# Altium PCB PCBJpepz.PcbDoc (part 2 of 2)
Units mm, origin at the board's own origin, x right, y up, seen from the top; angles counter-clockwise.
Board outline 100 x 110 mm, 2 copper layers (Top Layer, Bottom Layer); 249 components, 163 nets, 729 pads, 129 vias.
Unrouted connection lines stored in the file: 167.
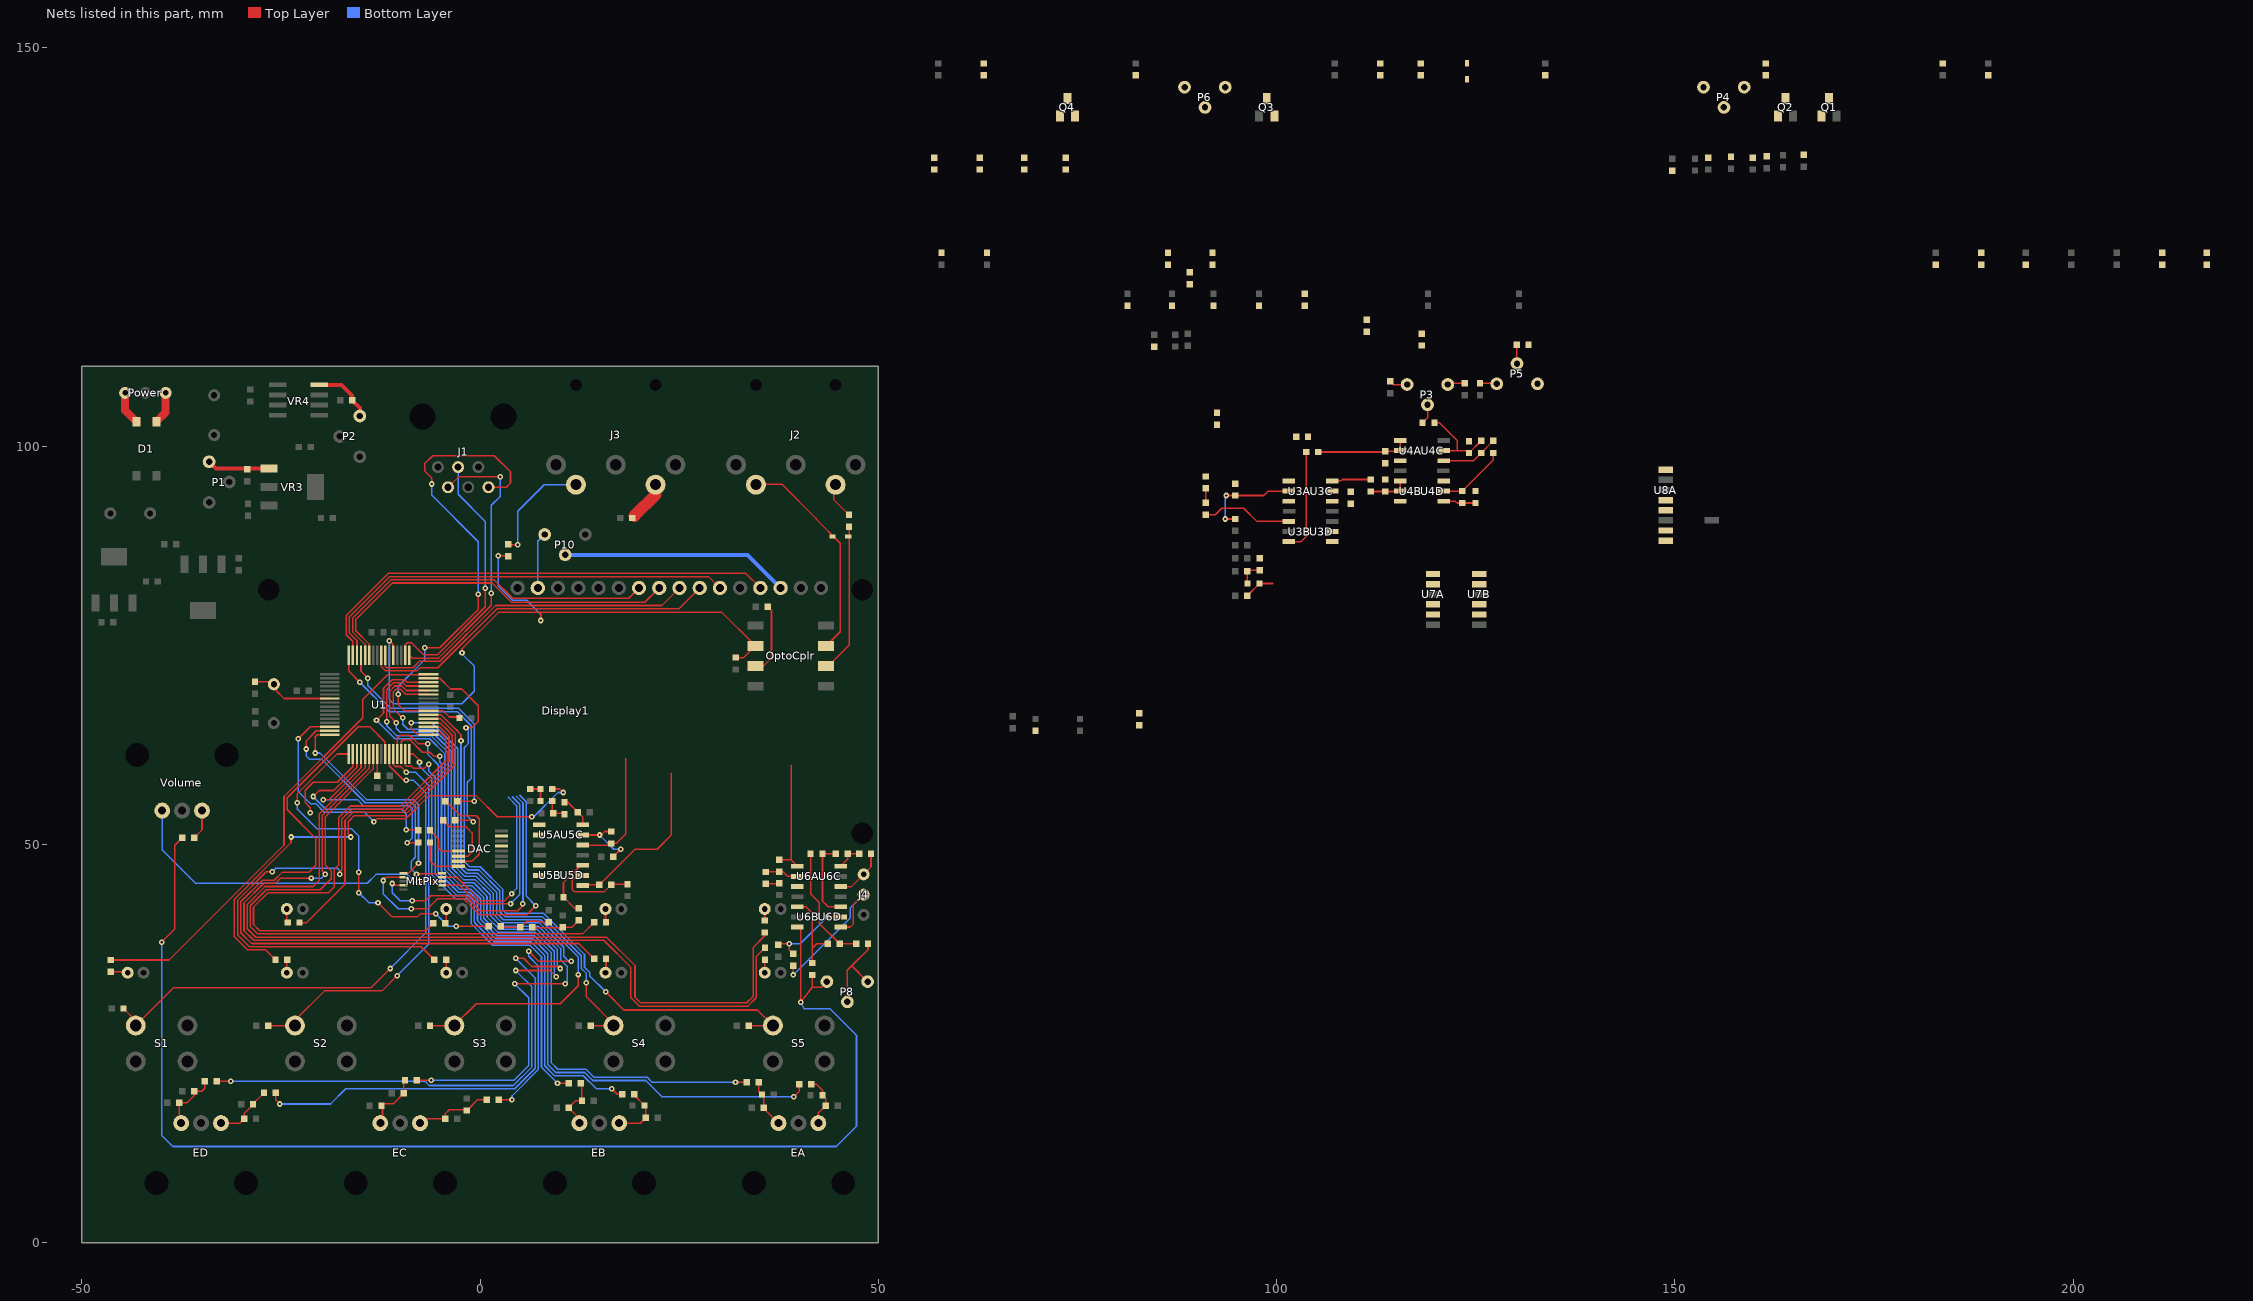
[diagram p2: the nets of this part, all layers, seen from the top]

## Via types
v1: diameter 0.7, hole 0.3, Top Layer to Bottom Layer, 119 vias
v2: diameter 1, hole 0.5, Top Layer to Bottom Layer, 10 vias

## Nets (pads, with @x,y where several pads share a name; then routed paths per layer and width w, separated by ;. In a path a pad name is that pad's centre, name@x,y a point inside that pad or via, vN(x,y) a via of type N, cw(c..) or ccw(c..) an arc to the next point about the centre after c; other vN are vias at no path point) (continued)
NetC12_2: C12.2 U1.39 Y1.1 | length 10.7
  Top Layer w0.2: C12.2@-28.194,70.409 -25.832,70.409 -25.527,70.104 -25.527,69.215 -24.622,68.31 U1.39@-18.885,68.31
NetC13_2: C13.2 U1.56 | length 2.9
  Top Layer w0.2: U1.56@-12.946,61.349 -12.946,59.317 -12.946,58.555 C13.2@-12.903,58.598
NetC19_1: C19.1 DAC.15
NetC19_2: C19.2 MltPlx.2 R17.1 | length 40.8
  Top Layer w0.2: v1(-12.192,45.466) -11.803,45.855 MltPlx.2@-9.652,45.855 ; v1(-8.636,41.91) -6.604,41.91 -5.353,43.161 -2.057,43.161 -1.22,42.324 -1.22,42.31 -0.058,41.148 5.842,41.148 v1(6.985,42.291)
  Bottom Layer w0.2: v1(-12.192,45.466) -12.192,43.815 -10.287,41.91 v1(-8.636,41.91) ; 4.976,56.157 5.772,55.361 5.772,43.504 v1(6.985,42.291)
NetC20_1: C20.1 DAC.13
NetC23_1: C23.1 R19.2 R36.2 U4B.1 U4B.2 | length 5
  Top Layer w0.2: C23.1@111.811,94.31 R36.2@113.614,94.31 115.486,94.31 115.537,94.361 U4B.1@115.537,95.631
NetC23_2: C23.2 R22.1 U3C.3 | length 4.9
  Top Layer w0.2: U3C.3@106.967,95.631 108.077,95.631 108.255,95.809 C23.2@111.811,95.809
NetC25_1: C25.1 R20.2 R37.1 U4A.1 U4A.2 | length 11.7
  Top Layer w0.2: R20.2@105.207,99.263 113.513,99.263 R37.1@113.614,99.365 115.461,99.365 115.537,99.441 U4A.1@115.537,100.711
NetC25_2: C25.2 R25.1 U3A.3
NetC28_1: C28.1 R21.1 R24.1 U3C.2
NetC28_2: C28.2 R16.1 R21.2 R29.2 U3C.1
NetC33_2: C33.2 U4A.3 U7A.5
NetC34_2: C34.2 U4B.3 U7B.5
NetC36_1: C36.1 Q4.3 R57.2 U5B.2
NetC36_2: C36.2 P6.2 P6.3 R64.1 U5B.1
NetC39_2: C39.2 R66.2 R67.1 | length 2.8
  Top Layer w0.2: C39.2@6.274,56.947 R66.2@7.569,56.947 R67.1@7.569,55.448
NetC40_2: C40.2 R67.2 R68.1 | length 3.1
  Top Layer w0.2: R67.2@9.068,55.448 9.068,53.924 10.465,53.924 R68.1@10.592,53.797
NetC41_2: C41.2 R72.2 R73.1 | length 6.4
  Top Layer w0.2: R72.2@2.591,39.7 2.718,39.573 R73.1@5.029,39.573 5.804,40.348 7.404,40.348 7.544,40.208 C41.2@8.585,40.208
NetC42_2: C42.2 R73.2 R74.1 | length 6.3
  Top Layer w0.2: R73.2@6.528,39.573 6.528,39.508 10.298,39.508 C42.2@10.363,39.573 11.481,39.573 R74.1@12.37,40.462
NetC43_2: C43.2 R77.2 R78.1 | length 3.1
  Top Layer w0.2: R78.1@96.342,82.753 96.317,82.779 C43.2@96.317,84.277 96.444,84.404 R77.2@97.866,84.404
NetC44_2: C44.2 R78.2 U6A.3 | length 3.8
  Top Layer w0.2: C44.2@96.317,81.229 R78.2@97.841,82.753 99.492,82.753
NetC47_1: C47.1 C48.2 P8.1 U6B.3 | length 163.1
  Top Layer w0.2: v1(-40.005,37.719) -38.354,39.37 -38.354,49.886 C48.2@-37.389,50.851 ; U6B.3@40.226,39.624 v1(40.226,30.193) 41.707,32.055 ; C47.1@41.707,33.604 41.707,32.055 ; P8.1@43.531,32.766 42.82,32.055 41.707,32.055
  Bottom Layer w0.2: v1(-40.005,37.719) -40.005,13.462 -38.608,12.065 44.704,12.065 47.244,14.605 47.244,26.035 43.942,29.337 40.701,29.337 v1(40.226,30.193)
NetC47_2: C47.2 R83.2 U6B.1 | length 10.6
  Top Layer w0.2: U6B.1@39.845,42.164 40.894,42.164 41.707,41.351 41.707,36.957 ; C47.2@41.707,35.103 41.707,36.957 ; R83.2@43.637,37.516 42.266,37.516 41.707,36.957
NetC48_1: C48.1 Volume.1 | length 3.8
  Top Layer w0.2: C48.1@-35.89,50.851 -34.925,51.816 Volume.1@-34.925,54.237
NetC49_1: C49.1 R81.1 R83.1 | length 14.9
  Top Layer w0.2: C49.1@41.478,48.844 41.478,43.808 42.545,42.741 42.545,40.107 R83.1@45.136,37.516 ; R83.1@45.161,37.541 R81.1@47.193,37.541
NetC49_2: C49.2 R84.1 U6D.3 | length 10.2
  Top Layer w0.2: R84.1@44.653,48.844 C49.2@42.977,48.844 42.977,42.875 43.688,42.164 U6D.3@45.245,42.164
NetC50_2: C50.2 EA.2 R101.2 R109.2 | length 6.4
  Top Layer w0.2: R109.2@41.58,19.888 42.215,19.888 42.977,19.126 C50.2@42.977,18.491 43.383,18.085 R101.2@43.383,17.196 42.456,16.269 EA.2@42.456,15
NetC51_2: C51.2 EA.1 R102.1 R110.2 | length 6.2
  Top Layer w0.2: R110.2@34.976,20.142 34.976,18.999 C51.2@35.382,18.593 35.611,18.364 R102.1@35.611,16.942 35.611,16.845 EA.1@37.456,15
NetC52_2: C52.2 EB.2 R103.2 R111.2 | length 7.1
  Top Layer w0.2: EB.2@17.456,15 20.105,15 R103.2@20.777,15.672 20.777,17.069 C52.2@20.625,17.221 19.355,18.491 R111.2@19.355,18.618
NetC53_2: C53.2 EB.1 R104.1 R112.2 | length 6.8
  Top Layer w0.2: EB.1@12.456,15 12.456,15.586 R104.1@11.1,16.942 11.989,17.831 C53.2@12.776,17.831 12.776,19.863 R112.2@12.624,20.015
NetC54_2: C54.2 EC.2 R105.2 R113.2 | length 10
  Top Layer w0.2: EC.2@-7.544,15 -6.999,15.545 R105.2@-4.369,15.545 -4.369,16.205 -3.886,16.688 -1.575,16.688 -0.305,17.958 R113.2@0.838,17.958
NetC55_2: C55.2 EC.1 R106.1 R114.2 | length 7.5
  Top Layer w0.2: EC.1@-12.544,15 -12.268,15.276 -12.268,17.45 -10.897,17.45 C55.2@-9.601,18.745 -9.601,20.218 R114.2@-9.449,20.371
NetC56_2: C56.2 ED.2 R107.2 R115.2 | length 7.4
  Top Layer w0.2: ED.2@-32.544,15 -30.187,15 R107.2@-29.642,15.545 -29.642,16.18 -28.677,17.145 -28.677,17.272 R115.2@-27.153,18.796
NetC57_2: C57.2 ED.1 R108.1 R116.2 | length 7.8
  Top Layer w0.2: ED.1@-37.544,15 -37.795,15.251 R108.1@-37.795,17.577 -36.779,17.577 -35.89,18.466 C57.2@-35.89,18.999 -34.976,18.999 -34.595,19.38 R116.2@-34.595,20.244
NetD1_1: D1.1 Power.1 | length 4.2
  Top Layer w1: Power.1@-44.577,106.68 -44.577,104.483 D1.1@-43.16,103.066
NetD1_2: D1.2 Power.3 | length 4.1
  Top Layer w1: D1.2@-40.66,103.066 -39.497,104.229 Power.3@-39.497,106.68
NetD2_1: D2.1 J2.5 OptoCplr.3 | length 26.7
  Top Layer w0.2: J2.5@34.491,95.201 37.895,95.201 42.175,90.921 42.175,90.84 45.212,87.803 45.212,76.708 OptoCplr.3@43.942,75.438
NetD2_2: D2.2 OptoCplr.2 R6.2 | length 18
  Top Layer w0.2: OptoCplr.2@44.069,72.771 46.355,75.057 46.355,81.312 46.35,81.317 46.35,82.683 46.355,82.688 R6.2@46.355,89.865
NetD3_1: D3.1 P4.3 Q4.2
NetD3_2: D3.2 R61.2
NetD4_1: D4.1 R87.2 | length 1.5
  Top Layer w0.2: R87.2@35.73,40.437 D4.1@35.73,41.889
NetD5_1: D5.1 R88.2 | length 1.5
  Top Layer w0.2: D5.1@35.73,33.889 R88.2@35.73,35.341
NetD6_1: D6.1 R89.2 | length 1.6
  Top Layer w0.2: R89.2@15.73,40.277 D6.1@15.73,41.889
NetD7_1: D7.1 R95.2 | length 1.7
  Top Layer w0.2: D7.1@15.799,33.958 R95.2@15.799,35.636
NetD8_1: D8.1 R96.2 | length 1.7
  Top Layer w0.2: R96.2@-4.27,40.205 D8.1@-4.27,41.889
NetD9_1: D9.1 R97.2 | length 1.6
  Top Layer w0.2: D9.1@-4.27,33.889 R97.2@-4.27,35.506
NetD10_1: D10.1 R98.2 | length 1.5
  Top Layer w0.2: R98.2@-24.27,40.398 D10.1@-24.27,41.889
NetD11_1: D11.1 R99.2 | length 1.6
  Top Layer w0.2: D11.1@-24.27,33.889 R99.2@-24.27,35.445
NetD12_1: D12.1 R100.2 | length 2
  Top Layer w0.2: R100.2@-46.406,33.985 D12.1@-44.366,33.985
NetDisplay1_3: Display1.3 P10.3 | length 28.8
  Bottom Layer w0.5: P10.3@10.668,86.36 33.553,86.36 Display1.3@37.72,82.193
NetDisplay1_4: Display1.4 U1.30 | length 54.4
  Top Layer w0.2: U1.30@-15.47,73.749 -15.47,75.549 -16.421,76.5 -16.421,78.563 -11.365,83.619 28.674,83.619 30.1,82.193
NetDisplay1_6: Display1.6 U1.31 | length 60.3
  Top Layer w0.2: U1.31@-15.986,73.749 -15.986,75.5 -16.821,76.335 -16.821,78.729 -11.531,84.019 33.354,84.019 35.18,82.193
NetDisplay1_7: Display1.7 U1.23 | length 42.5
  Top Layer w0.2: U1.23@-11.93,73.749 -11.93,72.399 -11.722,72.191 -8.416,72.191 -7.62,72.987 -5.072,72.987 1.932,79.991 22.818,79.991 25.02,82.193
NetDisplay1_8: Display1.8 U1.24 | length 45.9
  Top Layer w0.2: U1.24@-12.43,73.749 -12.43,72.333 -11.888,71.791 -7.933,71.791 -7.561,72.163 -5.33,72.163 2.098,79.591 24.958,79.591 27.56,82.193
NetDisplay1_9: Display1.9 U1.27 | length 46.9
  Top Layer w0.2: U1.27@-13.954,73.749 -13.954,75.165 -15.621,76.832 -15.621,78.232 -11.034,82.819 1.509,82.819 3.937,80.391 20.678,80.391 Display1.9@22.48,82.193
NetDisplay1_10: Display1.10 U1.28 | length 44.8
  Top Layer w0.2: U1.28@-14.454,73.749 -14.454,75.099 -16.021,76.666 -16.021,78.398 -11.2,83.219 1.744,83.219 4.072,80.891 18.638,80.891 Display1.10@19.94,82.193
NetDisplay1_15: Display1.15 P10.1 | length 7.1
  Bottom Layer w0.2: Display1.15@7.24,82.193 7.24,88.042 P10.1@8.098,88.9
NetJ1_1: J1.1 R3.1 U1.7 | length 63
  Top Layer w0.2: v1(-10.287,68.834) -10.287,67.564 -9.517,66.794 U1.7@-6.485,66.794 -4.666,66.794 -3.861,65.989 R3.1@-2.718,65.989 ; v1(-6.985,74.676) -5.08,74.676 -0.254,79.502 v1(-0.254,81.407) ; v1(-6.096,95.25) -6.096,96.012 -6.985,96.901 -6.985,97.79 -5.969,98.806 1.778,98.806 3.81,96.774 3.81,95.377 3.269,94.836 J1.1@1.04,94.836
  Bottom Layer w0.2: v1(-10.287,68.834) -10.287,69.85 -6.985,73.152 v1(-6.985,74.676) ; v1(-6.096,95.25) -6.096,93.853 -0.254,88.011 v1(-0.254,81.407)
NetJ1_4: J1.4 U1.18 | length 33.6
  Top Layer w0.2: U1.18@-9.39,73.749 -9.39,75.099 -9.34,75.049 -9.34,75.123 -9.164,75.299 -8.616,75.299 -7.104,73.787 -5.403,73.787 0.635,79.825 v1(0.635,82.169)
  Bottom Layer w0.2: J1.4@-2.77,97.376 -2.77,93.956 0.635,90.551 v1(0.635,82.169)
NetJ1_5: J1.5 U1.17 | length 36.9
  Top Layer w0.2: U1.17@-8.89,73.749 -8.528,73.387 -5.238,73.387 1.397,80.022 v1(1.397,81.534) ; J1.5@-4.04,94.836 -2.737,96.139 v1(2.54,96.139)
  Bottom Layer w0.2: v1(1.397,81.534) 1.397,92.583 2.54,93.726 v1(2.54,96.139)
NetJ2_4: J2.4 R6.1 | length 4.7
  Top Layer w0.2: J2.4@44.491,95.201 44.374,95.084 44.374,93.294 R6.1@46.304,91.364
NetJ3_4: J3.4 R5.1 | length 5
  Top Layer w1.5: R5.1@19.368,91.249 22.018,93.9 J3.4@22.018,95.163
NetJ3_5: J3.5 R8.1 | length 13.9
  Top Layer w0.2: R8.1@3.683,87.63 v1(4.699,87.63)
  Bottom Layer w0.2: v1(4.699,87.63) 4.699,91.821 8.041,95.163 J3.5@12.018,95.163
NetJ4_1: J4.1 R82.2 U6C.1 | length 6.5
  Top Layer w0.2: U6C.1@45.245,44.704 46.609,44.704 J4.1@48.133,46.228 49.073,47.168 R82.2@49.073,48.844
NetJ4_2: J4.2 R85.1 U6D.1 | length 20.9
  Top Layer w0.2: v1(39.294,33.604) R85.1@39.294,34.747 ; U6D.1@45.245,39.624 46.482,39.624 46.863,40.005 46.863,42.418 J4.2@48.133,43.688
  Bottom Layer w0.2: v1(39.294,33.604) 46.482,40.792 46.482,42.037 J4.2@48.133,43.688
NetP1_2: P1.2 R1.1 VR3.2 | length 7.9
  Top Layer w0.5: P1.2@-34.036,98.044 -33.161,97.169 VR3.2@-26.501,97.169
NetP2_1: P2.1 R2.2 VR4.2 | length 7.7
  Top Layer w0.5: VR4.2@-20.2,107.696 -17.399,107.696 -16.078,106.375 R2.2@-16.078,105.74 -15.113,104.775 P2.1@-15.113,103.789
NetP3_1: P3.1 R44.1 | length 2.3
  Top Layer w0.2: R44.1@114.249,108.128 114.643,107.734 P3.1@116.378,107.734
NetP3_2: P3.2 R43.2 | length 2.2
  Top Layer w0.2: P3.2@121.488,107.734 121.628,107.874 R43.2@123.622,107.874
NetP3_3: P3.3 R45.1 | length 2.5
  Top Layer w0.2: R45.1@118.313,102.946 118.948,103.581 P3.3@118.948,105.194
NetP4_1: P4.1 R53.2 U5A.1
NetP4_2: P4.2 R63.1
NetP5_1: P5.1 R60.1
NetP5_2: P5.2 R59.2 | length 2.1
  Top Layer w0.2: R59.2@125.527,107.874 P5.2@127.584,107.874
NetP5_3: P5.3 R62.1 | length 2.3
  Top Layer w0.2: P5.3@130.124,110.414 R62.1@130.124,112.725
NetP6_1: P6.1 R61.1
NetP7_1: P7.1 R80.1 | length 1.7
  Top Layer w0.2: P7.1@35.865,45.034 37.44,45.034 R80.1@37.541,45.136
NetP7_2: P7.2 R79.2 U6A.2 | length 4.2
  Top Layer w0.2: P7.2@35.89,46.558 R79.2@37.541,46.558 38.024,46.558 38.608,45.974 U6A.2@39.845,45.974
NetP8_2: P8.2 P8.3 R81.2 | length 11.2
  Top Layer w0.2: P8.3@46.101,30.226 46.101,34.188 46.66,34.747 ; P8.2@48.641,32.766 46.66,34.747 ; R81.2@48.692,37.541 48.692,36.779 46.66,34.747
NetP9_2: MltPlx.8 Volume.2 | length 42.8
  Top Layer w0.2: v1(-7.747,45.212) -7.662,45.297 -4.855,45.297 MltPlx.8@-4.805,45.347
  Bottom Layer w0.2: Volume.2@-39.925,54.237 -39.925,49.284 -35.726,45.085 -35.69,45.121 -14.188,45.121 -13.081,46.228 -9.144,46.228 -8.128,45.212 v1(-7.747,45.212)
NetQ1_2: Q1.2 Q2.2 Q3.3
NetQ1_3: Q1.3 R51.1
NetQ2_3: Q2.3 R52.1
NetQ3_1: Q3.1 Q4.1 R64.2
NetR7_1: OptoCplr.6 R7.1 R8.2 U1.21 | length 83.5
  Top Layer w0.2: v1(-11.43,75.565) -11.406,75.565 -10.964,75.123 -10.964,73.799 U1.21@-10.914,73.749 ; v1(-2.286,74.041) -2.286,74.549 2.286,79.121 7.62,79.121 ; v1(2.286,86.233) R8.2@3.302,86.233 ; v1(7.62,78.105) 7.62,79.121 ; R7.1@32.08,73.457 33.093,73.457 OptoCplr.6@34.566,74.93 ; OptoCplr.6@34.301,75.173 30.353,79.121 7.62,79.121
  Bottom Layer w0.2: v1(-11.43,75.565) -11.43,68.199 -10.888,67.657 -2.32,67.657 -0.762,69.215 -0.762,72.39 -2.286,73.914 v1(-2.286,74.041) ; v1(2.286,86.233) 2.286,82.423 4.064,80.645 5.842,80.645 7.62,78.867 v1(7.62,78.105)
NetR9_2: OptoCplr.7 R9.2 | length 9
  Top Layer w0.2: OptoCplr.7@34.566,72.39 35.56,72.39 36.576,73.406 36.576,79.375 R9.2@36.119,79.832
NetR10_1: R10.1 U1.51 | length 24.7
  Top Layer w0.2: v1(-20.955,56.007) -20.193,56.769 -18.392,56.769 -15.47,59.691 U1.51@-15.47,61.349 ; v1(-9.271,51.816) R10.1@-7.849,51.816
  Bottom Layer w0.2: v1(-20.955,56.007) -20.955,55.977 -19.404,54.426 -9.849,54.426 -9.271,53.848 v1(-9.271,51.816)
NetR10_2: DAC.5 R10.2 | length 5.3
  Top Layer w0.2: R10.2@-6.299,51.765 -5.207,50.673 -5.207,49.53 -4.826,49.149 DAC.5@-2.733,49.149
NetR11_1: R11.1 U1.32 | length 35.1
  Top Layer w0.2: U1.32@-16.486,73.749 -16.486,71.731 v1(-15.113,70.358) ; R11.1@-3.124,53.01 -1.067,53.01 v1(-0.889,52.832)
  Bottom Layer w0.2: v1(-15.113,70.358) -11.43,66.675 -2.891,66.675 -1.124,64.908 -1.124,58.274 -1.613,57.785 -1.613,53.556 v1(-0.889,52.832)
NetR11_2: DAC.6 R11.2 | length 8.6
  Top Layer w0.2: R11.2@-4.623,53.01 -3.81,52.197 -1.778,52.197 -1.016,51.435 -1.016,49.022 -1.524,48.514 DAC.6@-2.733,48.514
NetR12_1: R12.1 U1.29 | length 31.4
  Top Layer w0.2: U1.29@-14.97,73.749 -14.97,71.739 v1(-14.097,70.866) ; R12.1@-2.857,55.41 v1(-0.724,55.41)
  Bottom Layer w0.2: v1(-14.097,70.866) -14.097,69.908 -11.264,67.075 -2.725,67.075 -0.724,65.074 v1(-0.724,55.41)
NetR12_2: DAC.7 R12.2 | length 12.6
  Top Layer w0.2: R12.2@-4.369,55.423 -4.313,55.423 -2.484,53.594 -0.508,53.594 -0.127,53.213 -0.127,48.768 -1.016,47.879 DAC.7@-2.733,47.879
NetR13_1: R13.1 U1.52 | length 25.5
  Top Layer w0.2: v1(-19.685,55.626) -18.969,55.626 -14.97,59.625 U1.52@-14.97,61.349 ; v1(-9.144,50.203) R13.1@-7.836,50.203
  Bottom Layer w0.2: v1(-19.685,55.626) -15.413,55.626 -14.613,54.826 -8.89,54.826 -8.547,54.483 -8.547,50.8 v1(-9.144,50.203)
NetR13_2: DAC.8 R13.2 | length 6.1
  Top Layer w0.2: R13.2@-6.299,50.241 -6.299,47.955 -5.588,47.244 DAC.8@-2.733,47.244
NetR14_1: R14.1 R17.2 R20.1 U3B.3 | length 13
  Top Layer w0.2: U3B.3@101.567,88.011 103.066,88.011 103.708,88.653 R20.1@103.708,99.263
NetR14_2: R14.2 R15.1 R18.1 U3B.1 | length 11.5
  Top Layer w0.2: R18.1@91.11,91.389 92.278,91.389 93.091,92.202 95.885,92.202 97.536,90.551 U3B.1@101.567,90.551
NetR15_2: MltPlx.9 R15.2 | length 23.1
  Top Layer w0.2: MltPlx.9@-4.805,45.855 -2.929,45.855 -0.019,42.945 3.067,42.945 v1(3.937,43.815)
  Bottom Layer w0.2: 3.556,55.88 4.572,54.864 4.572,44.45 v1(3.937,43.815)
NetR16_2: MltPlx.7 R16.2 | length 23.9
  Top Layer w0.2: MltPlx.7@-4.805,44.847 -2.556,44.847 -0.254,42.545 v1(3.81,42.545)
  Bottom Layer w0.2: v1(3.81,42.545) 4.972,43.707 4.972,55.03 4.029,55.972
NetR18_2: R18.2 R19.1 R32.1 R33.1 R34.1 U7B.4 | length 1.8
  Top Layer w0.2: R18.2@91.11,92.888 R19.1@91.11,94.691
NetR23_1: R23.1 R26.2 U3A.1
NetR23_2: MltPlx.4 R23.2 | length 34.9
  Top Layer w0.2: v1(-11.049,45.085) -10.811,44.847 MltPlx.4@-9.652,44.847 ; v1(-8.509,42.926) -6.858,42.926 -6.223,43.561 -1.891,43.561 -0.82,42.49 -0.82,42.476 0,41.656 4.699,41.656 5.334,42.291 v1(5.334,42.545)
  Bottom Layer w0.2: v1(-11.049,45.085) -11.049,43.942 -10.033,42.926 v1(-8.509,42.926) ; 4.503,56.065 5.372,55.195 5.372,42.583 v1(5.334,42.545)
NetR26_1: R26.1 R27.1 U3A.2 | length 12.4
  Top Layer w0.2: v1(93.523,90.856) R27.1@94.818,90.856 ; v1(93.65,93.802) R26.1@94.793,93.802 98.374,93.802 98.933,94.361 U3A.2@101.567,94.361
  Bottom Layer w0.2: v1(93.523,90.856) 93.523,93.675 v1(93.65,93.802)
NetR28_1: R28.1 R29.1 U3D.2
NetR28_2: R28.2 R35.1 U3D.1
NetR30_1: R30.1 R31.1 R36.1 R37.2 U7A.4
NetR34_2: R34.2 R40.2 U8C.2
NetR35_2: R35.2 R41.1 U8A.4
NetR38_2: R38.2 U7B.2
NetR39_2: R39.2 U7A.2
NetR42_1: R42.1 U8A.5 U8C.1
NetR45_2: R45.2 R46.1 R49.2 U4C.2 | length 10.6
  Top Layer w0.2: R45.2@119.812,102.946 120.447,102.946 122.682,100.711 122.682,99.441 ; U4C.2@120.937,99.441 122.682,99.441 ; R46.1@125.679,100.66 R49.2@124.155,99.136 123.85,99.441 122.682,99.441
NetR46_2: R46.2 R50.1 U4C.1 | length 7.3
  Top Layer w0.2: U4C.1@120.937,98.171 124.714,98.171 R50.1@125.679,99.136 R46.2@127.178,100.635
NetR47_1: R47.1 U8A.1
NetR47_2: R47.2 R48.2 U4D.1 | length 4.1
  Top Layer w0.2: U4D.1@120.937,93.091 122.428,93.091 122.657,92.862 R48.2@123.317,92.862 R47.2@124.968,92.862
NetR48_1: R48.1 R50.2 U4D.2 | length 8.8
  Top Layer w0.2: U4D.2@120.937,94.361 R48.1@123.317,94.361 127.178,98.222 R50.2@127.178,99.136
NetR49_1: R49.1 R76.1 U5D.1 | length 21.4
  Top Layer w0.2: U5D.1@12.936,44.907 R76.1@14.935,44.907 19.431,49.403 22.225,49.403 24.003,51.181 24.003,58.928
NetR51_2: R51.2 U7A.1
NetR52_2: R52.2 U7B.1
NetR53_1: R53.1 R54.2 R58.2 R62.2 U5A.2
NetR54_1: R54.1 R79.1 U6A.1 | length 14.5
  Top Layer w0.2: R79.1@37.541,48.057 39.032,48.057 ; 39.032,59.944 39.032,48.057 ; U6A.1@39.845,47.244 39.032,48.057
NetR55_2: R55.2 R56.1 U4D.3
NetR58_1: R58.1 R70.1 U5C.1 | length 15.5
  Top Layer w0.2: U5C.1@12.86,49.911 16.231,49.911 R70.1@16.434,50.114 16.485,50.165 17.145,50.165 18.288,51.308 18.288,60.833
NetR65_2: R65.2 R68.2 U5C.3 | length 4
  Top Layer w0.2: R68.2@10.592,55.296 10.998,55.296 R65.2@12.268,54.026 12.86,53.434 U5C.3@12.86,52.451
NetR66_1: R66.1 U1.46 | length 51.3
  Top Layer w0.2: v1(-22.86,63.246) -21.344,64.762 U1.46@-18.885,64.762 ; v1(-13.338,52.832) -12.954,53.216 -9.334,53.216 -6.427,56.123 -0.518,56.123 2.138,53.467 v1(6.477,53.467) ; R66.1@9.068,56.947 9.982,56.947 v1(10.414,56.515)
  Bottom Layer w0.2: v1(-22.86,63.246) -22.86,56.642 -21.336,55.118 -20.662,55.118 -19.57,54.026 -14.532,54.026 v1(-13.338,52.832) ; v1(6.477,53.467) 6.731,53.467 9.779,56.515 v1(10.414,56.515)
NetR69_1: R69.1 R70.2 U5C.2 | length 8.5
  Top Layer w0.2: U5C.2@12.86,51.181 v1(14.986,51.181) 15.189,51.181 15.621,51.613 R70.2@16.434,51.613 ; R69.1@16.688,48.438 v1(17.653,49.403)
  Bottom Layer w0.2: v1(14.986,51.181) 16.764,49.403 v1(17.653,49.403)
NetR71_2: R71.2 R74.2 U5D.3 | length 7.6
  Top Layer w0.2: R74.2@12.37,41.961 11.887,41.961 R71.2@10.465,43.383 10.465,45.205 12.631,47.371 U5D.3@12.86,47.371
NetR72_1: R72.1 U1.49 | length 45.1
  Top Layer w0.2: v1(-22.987,55.245) -22.987,56.33 -17.968,61.349 U1.49@-16.486,61.349 ; v1(-15.24,43.942) v1(-15.24,46.482) ; v1(-12.827,42.672) -11.049,40.894 -7.874,40.894 -7.493,41.275 v1(-5.588,41.275) ; v1(-2.997,39.7) R72.1@1.092,39.7
  Bottom Layer w0.2: v1(-22.987,55.245) -22.987,54.483 -20.447,51.943 -16.129,51.943 -15.24,51.054 v1(-15.24,46.482) ; v1(-15.24,43.942) -13.97,42.672 v1(-12.827,42.672) ; v1(-5.588,41.275) -4.013,39.7 v1(-2.997,39.7)
NetR75_1: R75.1 R76.2 U5D.2 | length 10.1
  Top Layer w0.2: U5D.2@12.86,46.101 12.192,46.101 11.557,45.466 11.557,44.323 11.811,44.069 15.596,44.069 R76.2@16.434,44.907 16.535,45.009 R75.1@18.491,45.009
NetR77_1: R77.1 U1.50 | length 11.9
  Top Layer w0.2: v1(-21.336,53.975) -21.336,54.61 -21.971,55.245 -21.971,56.781 -20.967,57.785 -17.941,57.785 -15.986,59.74 U1.50@-15.986,61.349
NetR82_1: R82.1 R84.2 U6C.3 | length 3.4
  Top Layer w0.2: U6C.3@45.245,47.244 46.152,48.151 R84.2@46.152,48.844 R82.1@47.574,48.844
NetR85_2: R85.2 R86.1 U6D.2 | length 10.4
  Top Layer w0.2: R86.1@37.668,37.516 v1(38.811,37.516) 38.811,36.728 R85.2@39.294,36.246 ; v1(43.561,40.894) U6D.2@45.245,40.894
  Bottom Layer w0.2: v1(38.811,37.516) 40.183,37.516 v1(43.561,40.894)
NetR87_1: R87.1 U1.53 | length 110.3
  Top Layer w0.2: U1.53@-14.454,61.349 -14.454,59.575 -20.231,53.798 -20.231,45.428 -20.953,44.706 -27.014,44.706 -29.261,42.46 -29.261,39.421 -28.194,38.354 15.862,38.354 19.431,34.785 19.431,30.792 20.124,30.099 33.47,30.099 34.271,30.9 34.271,37.065 35.738,38.532 R87.1@35.738,38.938
NetR88_1: R88.1 U1.54 | length 110.5
  Top Layer w0.2: v1(-21.209,45.771) -25.037,45.771 -25.702,45.106 -27.18,45.106 -29.661,42.625 -29.661,39.167 -28.448,37.954 15.5,37.954 18.923,34.531 18.923,30.734 19.958,29.699 33.636,29.699 34.671,30.734 34.671,35.916 R88.1@35.763,37.008 ; v1(-19.431,46.228) -19.831,46.628 -19.831,53.633 -13.954,59.51 U1.54@-13.954,61.349
  Bottom Layer w0.2: v1(-21.209,45.771) -19.888,45.771 v1(-19.431,46.228)
NetR89_1: R89.1 U1.55 | length 76.8
  Top Layer w0.2: U1.55@-13.446,61.349 -13.446,59.452 -19.431,53.467 -19.431,47.371 -18.703,46.643 -18.703,45.686 -20.083,44.306 -26.848,44.306 -28.861,42.294 -28.861,39.675 -27.94,38.754 12.846,38.754 R89.1@14.3,40.208
NetR90_1: R90.1 S5.1 U1.15 | length 81.5
  Top Layer w0.2: U1.15@-6.485,70.85 -5.064,70.85 -3.721,69.507 -2.324,69.507 -0.237,67.42 -0.237,65.422 -1.016,64.643 v1(-1.778,64.643) ; v1(15.748,31.496) 18.034,29.21 34.79,29.21 S5.1@36.75,27.25 R90.1@33.939,27.25
  Bottom Layer w0.2: v1(-1.778,64.643) -1.524,64.389 -1.524,62.611 -2.013,62.122 -2.013,47.86 -1.333,47.18 0.006,47.18 2.857,44.329 2.857,41.72 3.239,41.338 7.949,41.338 13.102,36.186 13.102,34.583 13.735,33.949 13.735,33.509 v1(15.748,31.496)
NetR91_1: R91.1 S4.1 U1.6 | length 55.8
  Top Layer w0.2: U1.6@-6.485,66.278 -4.922,66.278 -3.226,64.582 -3.226,64.567 -3.211,64.567 -2.413,63.769 v1(-2.413,62.992) ; v1(13.335,32.639) 13.335,30.861 16.75,27.446 S4.1@16.75,27.25 R91.1@14.127,27.25
  Bottom Layer w0.2: v1(-2.413,62.992) -2.413,47.631 -1.562,46.78 -0.16,46.78 2.457,44.163 2.457,41.554 3.073,40.938 7.783,40.938 12.702,36.02 12.702,34.417 13.335,33.784 v1(13.335,32.639)
NetR92_1: R92.1 S3.1 U1.1 | length 70.7
  Top Layer w0.2: v1(-8.636,65.278) -8.636,64.516 -7.874,63.754 U1.1@-6.485,63.754 ; R92.1@-6.278,27.25 S3.1@-3.25,27.25 -0.508,29.992 10.053,29.992 12.319,32.258 v1(12.319,33.655)
  Bottom Layer w0.2: v1(-8.636,65.278) -6.089,65.278 -2.83,62.019 -2.83,47.449 -1.761,46.38 -0.326,46.38 2.057,43.997 2.057,41.389 2.908,40.538 7.618,40.538 12.302,35.854 v1@12.302,33.672
NetR93_1: R93.1 S2.1 U1.60 | length 51.5
  Top Layer w0.2: R93.1@-26.619,27.229 S2.1@-23.271,27.229 ; S2.1@-23.25,27.25 -23.25,27.912 -19.558,31.604 -12.338,31.604 v1(-10.414,33.528) ; U1.60@-10.914,61.349 -10.914,60.022 -10.664,59.772 -9.988,59.772 v1(-9.271,59.055)
  Bottom Layer w0.2: v1(-10.414,33.528) -6.458,37.484 -6.458,57.385 -7.874,58.801 -8.128,59.055 v1(-9.271,59.055)
NetR94_1: R94.1 S1.1 U1.59 | length 69.1
  Top Layer w0.2: R94.1@-44.78,29.388 -43.25,27.858 S1.1@-43.25,27.25 -38.496,32.004 -13.716,32.004 v1(-11.303,34.417) ; U1.59@-11.414,61.349 -11.414,59.857 -9.596,58.039 v1(-9.271,58.039)
  Bottom Layer w0.2: v1(-11.303,34.417) -6.858,38.862 -6.858,56.515 -8.382,58.039 v1(-9.271,58.039)
NetR95_1: R95.1 U1.58 | length 89.2
  Top Layer w0.2: U1.58@-11.93,61.349 -11.98,61.399 -11.98,62.899 -13.843,64.762 -15.317,64.762 -24.238,55.841 -24.238,54.337 -20.631,50.73 -20.631,47.371 -21.52,46.482 -24.892,46.482 -25.868,45.506 -27.345,45.506 -30.061,42.791 -30.061,38.913 -28.702,37.554 12.382,37.554 R95.1@14.3,35.636
NetR96_1: R96.1 U1.2 | length 67.4
  Top Layer w0.2: U1.2@-6.485,64.254 -6.435,64.204 -5.11,64.204 -4.826,63.92 -4.826,63.904 -4.318,63.396 -4.318,60.495 -9.997,54.816 -16.304,54.816 -17.78,53.34 -17.78,47.371 -18.303,46.848 -18.303,44.689 -19.086,43.906 -26.683,43.906 -28.461,42.128 -28.461,39.929 -27.686,39.154 -6.82,39.154 R96.1@-5.893,40.081
NetR97_1: R97.1 U1.3 | length 75.2
  Top Layer w0.2: v1(-26.093,46.551) -26.866,46.551 -30.461,42.957 -30.461,38.659 -28.956,37.154 -7.411,37.154 R97.1@-5.766,35.509 ; v1(-17.653,46.228) -17.653,46.482 -17.38,46.755 -17.38,53.174 -16.138,54.416 -9.831,54.416 -3.918,60.329 -3.918,63.562 -4.426,64.07 -4.426,64.085 -5.045,64.704 -6.427,64.704 U1.3@-6.485,64.762
  Bottom Layer w0.2: v1(-26.093,46.551) -25.654,46.99 -17.907,46.99 -17.653,46.736 v1(-17.653,46.228)
NetR98_1: R98.1 U1.4 | length 39.3
  Top Layer w0.2: R98.1@-22.682,40.183 -21.793,40.183 -16.98,44.996 -16.98,53.009 -15.972,54.016 -9.665,54.016 -3.518,60.164 -3.518,63.743 -3.542,63.767 -3.557,63.767 -4.026,64.236 -4.026,64.251 -4.987,65.212 -6.435,65.212 U1.4@-6.485,65.262
NetR99_1: R99.1 U1.5 | length 55.9
  Top Layer w0.2: R99.1@-25.705,35.509 -26.95,36.754 -29.21,36.754 -30.861,38.405 -30.861,43.122 -23.749,50.234 v1(-23.749,50.927) ; v1(-16.256,50.927) -16.58,51.251 -16.58,52.843 -15.807,53.616 -9.5,53.616 -3.118,59.998 -3.118,63.909 -3.376,64.167 -3.392,64.167 -3.626,64.401 -3.626,64.417 -4.987,65.778 U1.5@-6.485,65.778
  Bottom Layer w0.2: v1(-23.749,50.927) v1(-16.256,50.927)
NetR100_1: R100.1 U1.16 | length 59.7
  Top Layer w0.2: R100.1@-46.406,35.484 -39.065,35.484 -24.638,49.911 -24.638,56.007 -14.732,65.913 -14.732,68.199 -11.631,71.3 -6.535,71.3 U1.16@-6.485,71.35
NetR109_1: R109.1 U1.61 | length 90.9
  Top Layer w0.2: U1.61@-10.398,61.349 -10.398,63.32 -10.019,63.699 -8.835,63.699 -7.747,62.611 v1(-6.604,62.611) ; v1(39.37,18.288) 40.081,18.999 R109.1@40.081,19.888
  Bottom Layer w0.2: v1(-6.604,62.611) -6.604,61.341 -5.258,59.995 -5.258,46.483 -2.755,43.98 -1.32,43.98 -0.343,43.003 -0.343,40.395 1.914,38.138 6.624,38.138 8.496,36.266 8.496,22.353 9.494,21.355 13.12,21.355 14.126,20.349 20.799,20.349 22.86,18.288 v1(39.37,18.288)
NetR110_1: R110.1 U1.62 | length 80.8
  Top Layer w0.2: U1.62@-9.898,61.349 -9.898,62.873 -9.652,63.119 -8.821,63.119 -7.278,61.576 -6.331,61.576 -5.842,61.087 v1(-5.08,61.087) ; v1(32.055,20.142) R110.1@33.477,20.142
  Bottom Layer w0.2: v1(-5.08,61.087) -5.08,60.383 -4.858,60.161 -4.858,46.648 -2.59,44.38 -1.154,44.38 0.057,43.169 0.057,40.56 2.079,38.538 6.789,38.538 8.896,36.431 8.896,22.6 9.741,21.755 13.285,21.755 14.292,20.749 20.965,20.749 21.571,20.142 v1(32.055,20.142)
NetR111_1: R111.1 U1.63 | length 63.4
  Top Layer w0.2: U1.63@-9.39,61.349 -9.39,59.951 -9.238,59.799 -8.616,59.799 -8.613,59.802 -8.374,59.563 -6.985,59.563 v1(-6.477,60.071) ; v1(16.51,19.304) 17.196,18.618 R111.1@17.856,18.618
  Bottom Layer w0.2: v1(-6.477,60.071) -6.477,59.24 -5.658,58.421 -5.658,46.317 -2.921,43.58 -1.485,43.58 -0.743,42.838 -0.743,40.229 1.748,37.738 6.419,37.738 8.057,36.1 8.096,36.1 8.096,22.188 9.329,20.955 12.954,20.955 14.605,19.304 v1(16.51,19.304)
NetR112_1: R112.1 U1.64 | length 54.3
  Top Layer w0.2: U1.64@-8.89,61.349 -8.39,61.349 -7.62,60.579 v1(-7.62,60.325) ; v1(9.703,20.015) R112.1@11.125,20.015
  Bottom Layer w0.2: v1(-7.62,60.325) -7.62,59.817 -6.058,58.255 -6.058,46.151 -3.087,43.18 -1.651,43.18 -1.143,42.672 -1.143,40.063 1.582,37.338 6.253,37.338 7.696,35.895 7.696,22.022 v1(9.703,20.015)
NetR113_1: R113.1 U1.11 | length 81.7
  Top Layer w0.2: v1(-9.716,65.913) -9.779,65.913 -10.937,67.071 -10.937,69.103 -10.556,69.484 -10.018,69.484 -9.402,68.868 -6.535,68.868 U1.11@-6.485,68.818 ; R113.1@2.337,17.958 v1(3.988,17.958) ; v1(6.096,36.576) 7.366,35.306 v1(11.43,35.306)
  Bottom Layer w0.2: v1(-9.716,65.913) -9.716,65.087 -9.089,64.461 -5.838,64.461 -3.23,61.853 -3.23,47.283 -1.927,45.98 -0.491,45.98 1.657,43.832 1.657,41.223 2.742,40.138 7.452,40.138 10.496,37.094 10.496,35.941 11.131,35.306 v1(11.43,35.306) ; v1(3.988,17.958) 3.988,18.42 7.296,21.728 7.296,34.741 6.096,35.941 v1(6.096,36.576)
NetR114_1: R114.1 U1.12 | length 89.5
  Top Layer w0.2: v1@-10.604,65.341 -11.337,66.074 -11.337,69.269 -10.722,69.884 -9.852,69.884 -9.286,69.318 U1.12@-6.485,69.318 ; R114.1@-7.95,20.371 v1(-6.147,20.371) ; v1(4.318,32.512) v1(10.668,32.512)
  Bottom Layer w0.2: v1(-10.541,65.278) -10.541,64.569 -10.033,64.061 -6.003,64.061 -3.63,61.688 -3.63,47.117 -2.093,45.58 -0.657,45.58 1.257,43.666 1.257,41.057 2.576,39.738 7.286,39.738 10.096,36.928 10.096,35.497 10.922,34.671 10.922,32.766 v1(10.668,32.512) ; v1(-6.147,20.371) 4.242,20.371 6.096,22.225 6.096,30.734 v1(4.318,32.512)
NetR115_1: R115.1 U1.13 | length 112.4
  Top Layer w0.2: R115.1@-25.654,18.796 -25.654,17.907 v1(-25.146,17.399) ; v1(-11.737,65.405) -11.737,69.435 -10.888,70.284 -9.686,70.284 -9.286,69.884 -6.535,69.884 U1.13@-6.485,69.834 ; v1(4.445,35.687) 5.461,35.687 6.477,34.671 9.779,34.671 v1(10.033,34.417)
  Bottom Layer w0.2: v1(-25.146,17.399) -18.796,17.399 -16.874,19.321 4.323,19.321 6.896,21.894 6.896,33.236 v1(4.445,35.687) ; v1(-11.737,65.405) -11.737,64.881 -10.517,63.661 -6.169,63.661 -4.03,61.522 -4.03,46.952 -2.258,45.18 -0.823,45.18 0.857,43.5 0.857,40.892 2.411,39.338 7.121,39.338 9.696,36.763 9.696,34.754 v1(10.033,34.417)
NetR116_1: R116.1 U1.14 | length 117.1
  Top Layer w0.2: R116.1@-33.096,20.244 v1(-31.318,20.244) ; v1(-13.018,65.595) -12.137,66.476 -12.137,69.6 -11.053,70.684 -9.521,70.684 -9.176,70.339 U1.14@-6.93,70.339 ; v1(4.445,34.163) 8.763,34.163 v1(9.525,33.401)
  Bottom Layer w0.2: v1(-31.318,20.244) -6.939,20.244 -6.416,19.721 4.157,19.721 6.496,22.059 6.496,32.112 v1(4.445,34.163) v1@4.382,34.227 ; v1(-13.018,65.595) -10.683,63.261 -6.335,63.261 -4.43,61.356 -4.43,46.786 -2.424,44.78 -0.988,44.78 0.457,43.335 0.457,40.726 2.245,38.938 6.955,38.938 9.296,36.597 9.296,33.63 v1(9.525,33.401)
NetU1_47: MltPlx.10 U1.47 | length 34
  Top Layer w0.2: v1(-21.844,61.976) -21.844,62.992 -20.582,64.254 U1.47@-18.885,64.254 ; v1(-8.001,46.228) -7.924,46.305 -4.855,46.305 MltPlx.10@-4.805,46.355
  Bottom Layer w0.2: v1(-21.844,61.976) -21.844,61.087 -21.469,60.712 -19.933,60.712 -14.447,55.226 -8.567,55.226 -8.147,54.806 -8.147,48.368 -8.636,47.879 -8.636,46.863 v1(-8.001,46.228)
NetU1_48: MltPlx.1 U1.48 | length 29.4
  Top Layer w0.2: v1(-20.701,61.468) -20.701,63.5 -20.447,63.754 U1.48@-18.885,63.754 ; MltPlx.1@-9.652,46.355 -9.017,46.355 v1(-7.747,47.625)
  Bottom Layer w0.2: v1(-20.701,61.468) -20.124,61.468 -14.282,55.626 -8.401,55.626 -7.747,54.972 v1(-7.747,47.625)
pads on no net: C20.2 C21.2 C22.1 DAC.1 DAC.2 DAC.3 DAC.4 DAC.9 DAC.10 DAC.12 DAC.14 DAC.16 Display1.0 Display1.11 Display1.12 Display1.13 Display1.14 EA.0 EB.0 EC.0 ED.0 J1.0 J1.6 J2.0 J2.1 J2.2 J2.3 J3.0 J3.1 J3.3 OptoCplr.1 OptoCplr.4 S1.3 S1.4 S2.3 S2.4 S3.3 S3.4 S4.3 S4.4 S5.3 S5.4 U1.8 U1.22 U1.33 U1.34 U1.35 U1.36 U1.37 U1.42 U1.43 U1.44 U1.45 U3.0 U3A.0 U3B.0 U3C.0 U3D.0 U4.0 U4A.0 U4B.0 U4C.0 U4D.0 U5.0 U5A.0 U5B.0 U5C.0 U5D.0 U6.0 U6A.0 U6B.0 U6C.0 U6D.0 U8A.2 Volume.0 VR4.

## Other copper
Top Layer:
  text "MultiPlex>" at 3.683,65.532 h1 r270
  text "Frequency" at 18.796,60.325 h1 r270
  text "Filter Mod" at 39.37,59.944 h1 r270
  text "-9V" at 14.097,59.436 h1 r270
  text "Resonance" at 24.511,59.309 h1 r270

## Text inside footprints (layer, text, board x,y; h text height)
D1: Top Overlay "~" at -41.783,100.076 h0.8 r330; Top Overlay "~" at -43.942,99.949 h0.8 r330
J4: Top Overlay "1" at 46.101,47.879 h0.8 r270
Power: Top Overlay "1" at -46.228,104.648 h0.8